# Altium PCB NewOver.PcbDoc
Units mil, origin at the board's own origin, x right, y up, seen from the top; angles counter-clockwise.
Board outline 1340 x 1670 mil, 2 copper layers (Top Layer, Bottom Layer); 37 components, 58 nets, 131 pads, 41 vias.
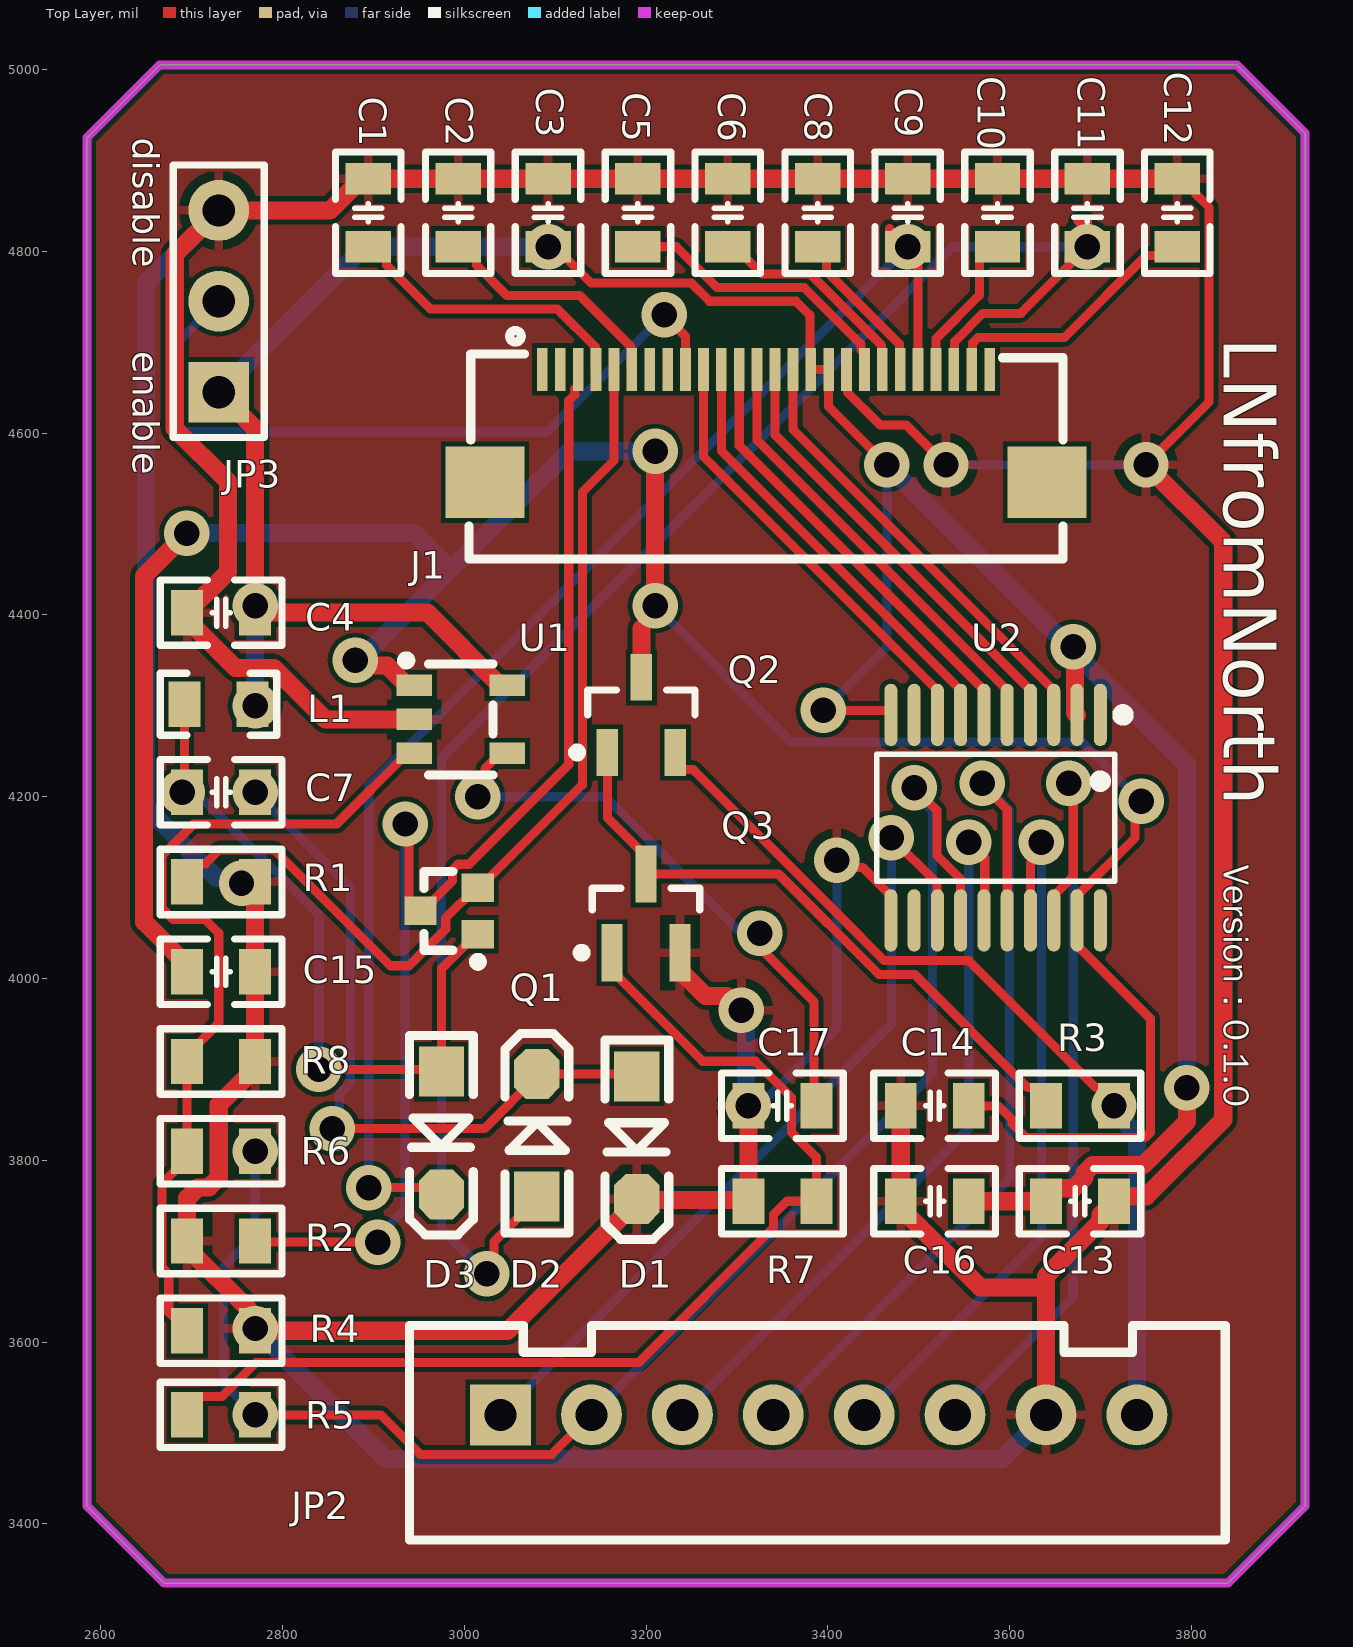
[diagram p0: Top Layer view]
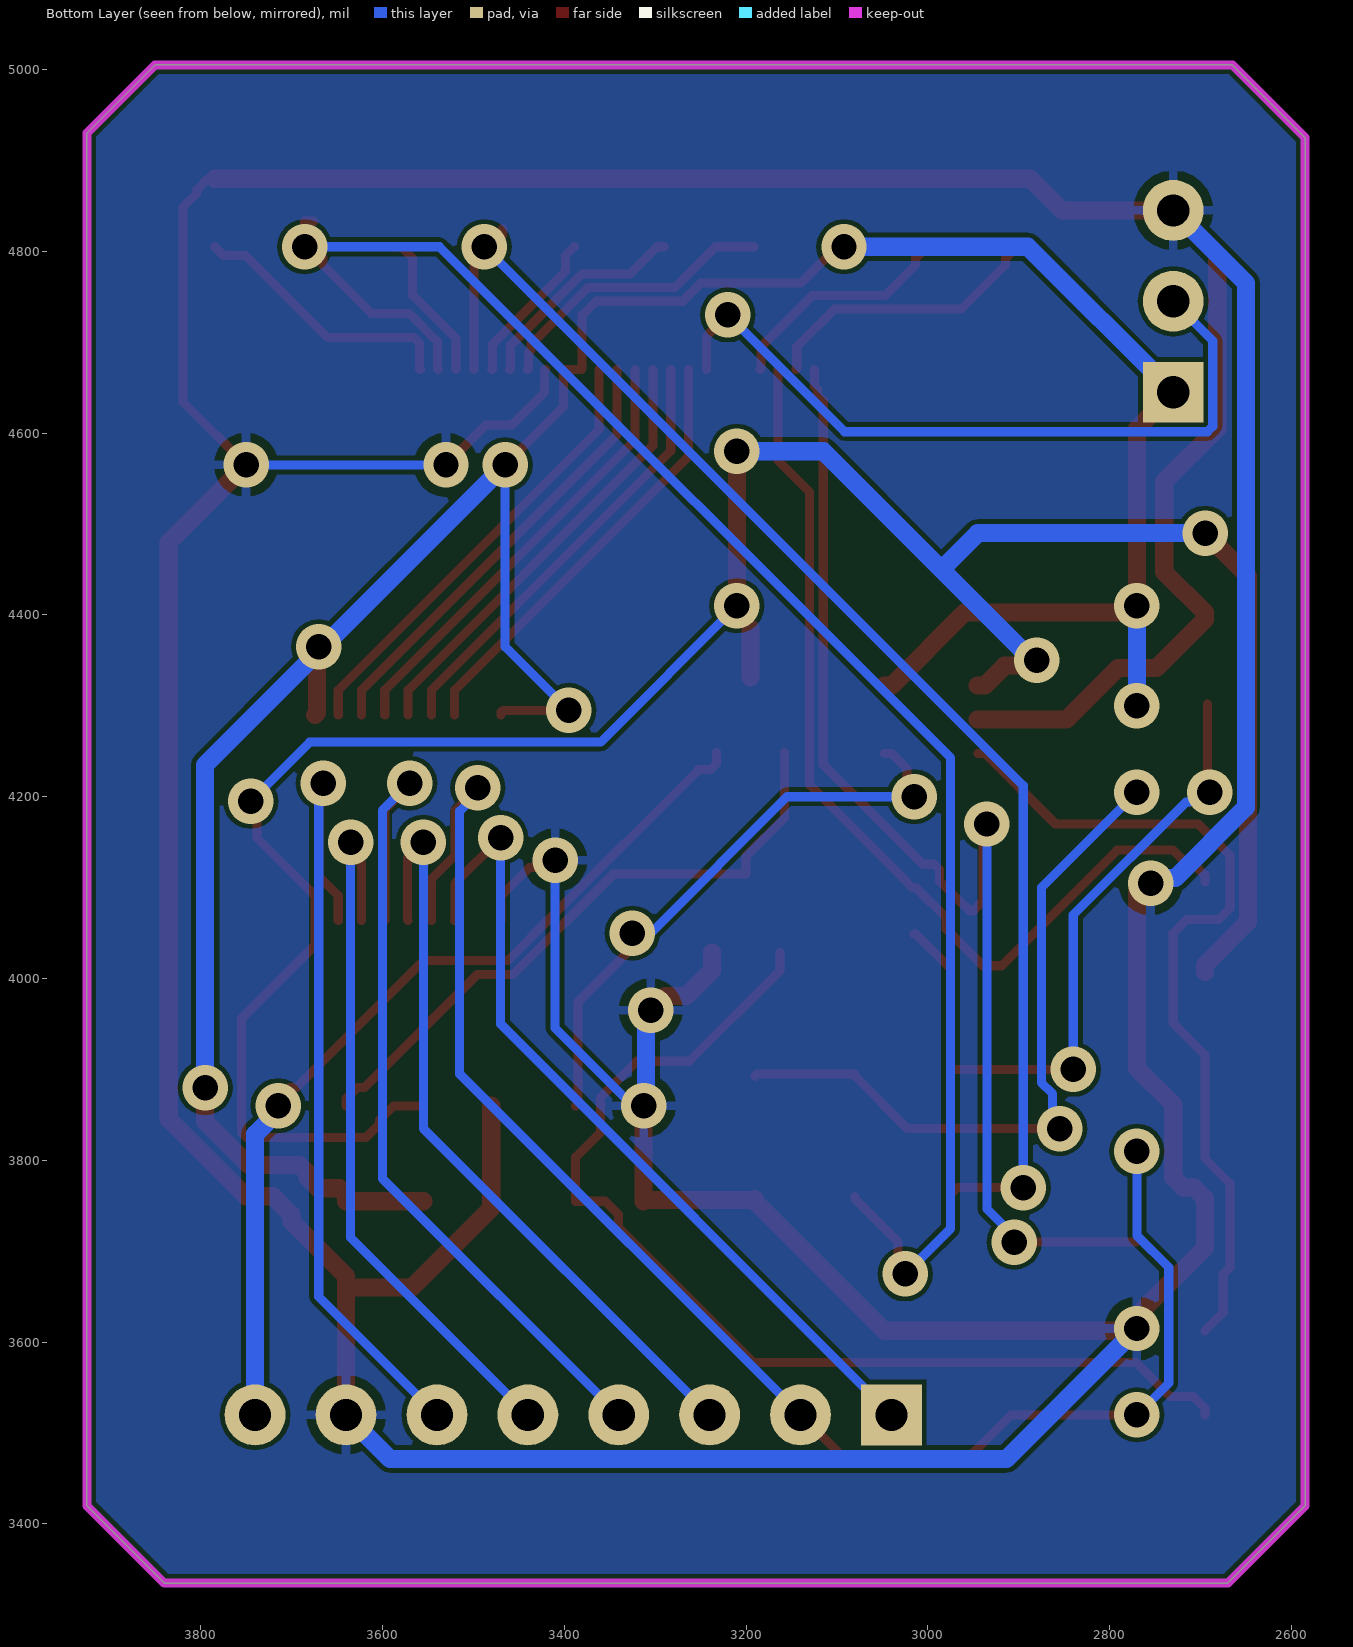
[diagram p1: Bottom Layer view, seen from below]

## Layer stack, top to bottom
Top Solder: solder mask 0.4, Solder Resist, Dk 3.5
Top Layer: signal copper 1.4
Dielectric 1: dielectric 12.6, FR-4, Dk 4.8
Bottom Layer: signal copper 1.4
Bottom Solder: solder mask 0.4, Solder Resist, Dk 3.5

## Board outline
2585,3420 2585,4925 2665,5005 3850,5005 3855,5000 3925,4930 3925,3420 3840,3335 2670,3335

## Design rules (kind name [scope] priority, off if disabled: settings)
Clearance [All] p1: gap=5 ignorepadtopadclearanceinfootprint=FALSE
PolygonConnect [All] p1: connectstyle=Relief reliefconductorwidth=10 reliefentries=4 polygonreliefangle="90 Angle" airgapwidth=10
RoutingVias [All] p1: holewidth=28 width=50 viastyle="Through Hole" minholewidth=28 minwidth=50 maxholewidth=28 maxwidth=50
SolderMaskExpansion [All] p1: expansion=4 istentingtop=FALSE
Width [All] p1: maxlimit=100 minlimit=10 preferedwidth=10 minimp=50.000000 maximp=50.000000 favimp=50.000000
30 further rules are at their usual default settings.

## Components (designator, comment, footprint, x,y, rotation, side; value= is the part's Value field where it differs from the comment)
C1 "104" C0805_L 2894.45,4842.4 r270 top
C2 "104" C0805_L 2993.34,4842.4 r270 top
C3 "104" C0805_L 3092.22,4842.4 r270 top
C4 "104" C0805_L 2732.6,4402.5 r0 top
C5 "104" C0805_L 3191.11,4842.4 r270 top
C6 "104" C0805_L 3290,4842.4 r270 top
C7 "104" C0805_L 2732.6,4205 r180 top
C8 "104" C0805_L 3388.89,4842.4 r270 top
C9 "104" C0805_L 3487.78,4842.4 r270 top
C10 "104" C0805_L 3586.67,4842.4 r270 top
C11 "104" C0805_L 3685.56,4842.4 r270 top
C12 "104" C0805_L 3784.45,4842.4 r270 top
C13 "104" C0805_L 3677.4,3755 r0 top
C14 "104" C0805_L 3517.6,3860 r180 top
C15 "104" C0805_L 2732.6,4007.5 r0 top
C16 "104" C0805_L 3517.6,3755 r180 top
C17 "104" C0805_L 3350,3860 r180 top
D1 "1N4007" SOD-123 3190,3825 r270 top
D2 "1N4007" SOD-123 3080,3827.5 r90 top
D3 "1N4007" SOD-123 2975,3830 r270 top
J1 "PFC26" PFC26 3085.9,4670 r0 top
JP2 "HDR-1X8" XH2.54-LI-8P 3390,3520 r0 top
JP3 "HDR-1X3" HDR2.54-LI-3P 2730,4745 r90 top
L1 "10uH" L0805 2729.67,4301.75 r180 top
Q1 "si1308" si1308 3015,4048.82 r0 top (schematic designator Q?)
Q2 "AO3401" SOT23-3N 3195,4290 r90 top
Q3 "BCP68" SOT23-3M 3200,4071.69 r90 top
R1 "1K" R0805_L 2732.6,4106.25 r0 top
R2 "1K" R0805_L 2732.6,3711.25 r0 top
R3 "1K" R0805_L 3677.4,3860 r180 top
R4 "1K" R0805_L 2732.6,3612.5 r180 top
R5 "1K" R0805_L 2732.6,3520 r180 top
R6 "1K" R0805_L 2732.6,3810 r180 top
R7 "1K" R0805_L 3350,3755 r180 top
R8 "1K" R0805_L 2732.6,3908.75 r0 top
U1 "RT9193-33" RT9193-33 2945,4322.4 r180 top
U2 "TXS0108E" TXS0108E 3699.72,4290 r180 top

## Footprints (in the part's own frame and the unit in brackets; to place one, negate y for a bottom-side part, rotate by r counter-clockwise, add the part's x,y. Pads: shape width x height; smd on the part's side, far side on the other; paste and mask are expansions set on the pad)
C0805_L [mil] "贴片MLCC电容"
  rect 35x50 smd: 1(-37.41,0) 2(37.4,0)
  silkscreen extent -67,-36 67,36, body extent -39,-24 39,24, height 22
HDR2.54-LI-3P [mm] "排针，3脚                        联系卖家 免费查找封装"
  rect 1.7x1.7 hole 0.9: 1(-2.54,0)
  round 1.7 hole 0.9: 2(0,0) 3(2.54,0)
  silkscreen extent -3.81,-1.27 3.81,1.27, body extent -3.81,-1.27 3.81,1.27, height 2.54
L0805 [mil] "小功率贴片电感                联系卖家 免费查找封装"
  rect 35x50 smd: 1(-37.4,0) 2(37.4,0)
  silkscreen extent -64,-34 64,34, body extent -39,-24 39,24, height 35
PFC26 [mm]
  rect 0.3x1.2 smd: 1(0,0) 2(0.502,0) 3(1.002,0) 4(1.502,0) 5(2.002,0) 6(2.502,0) 7(3.002,0) 8(3.502,0) 9(4.002,0) 10(4.502,0) 11(5.002,0) 12(5.502,0) 13(6.002,0) 14(6.502,0) 15(7.002,0) 16(7.502,0) 17(8.002,0) 18(8.502,0) 19(9.004,-0.002) 20(9.502,0) 21(10,0.002) 22(10.5,0.002) 23(11,0.002) 24(11.5,0.002) 25(12,0.002) 26(12.5,0.002)
  rect 2.2x2 smd: 27(14.1,-3.15) 28(-1.6,-3.15)
  silkscreen extent -2.05,-5.3 14.55,1.09
R0805_L [mil] "1/8W贴片电阻"
  rect 35x50 smd: 1(-37.41,0) 2(37.4,0)
  silkscreen extent -67,-36 67,36, body extent -39,-25 39,25, height 20
RT9193-33 [mm]
  rect 1x0.6 smd: 1(0,0) 2(0,0.95) 3(0,1.9) 4(-2.6,1.9) 5(-2.6,0)
  silkscreen extent -2.2,-0.83 0.35,2.5
si1308 [mm]
  rect 0.9x0.8 smd: 1(0,0) 2(0,1.3) 3(-1.6,0.65)
  silkscreen extent -1.5,-0.9 0.13,1.75
SOD-123 [mil] "2.7x1.6X1.1mm（长宽高，不包括引脚） 淘宝ID:黄晶宝石"
  rect 55x50 smd: 1(-67.5,0)
  oct 55x50 smd: 2(67.5,0)
  silkscreen extent -108,-35 112,35, body extent -73,-32 73,31, height 50
SOT23-3M [mm] "SOT23, 3-Leads, Body 2.9x1.3mm, Pitch 0.95mm, Lead Span 2.4mm, IPC Low Density"
  rect 1.6x0.6 smd: 1(-1.1,0.95) 2(-1.1,-0.95) 3(1.1,0)
  silkscreen extent -1.22,-1.5 0.7,1.92, body extent -1.4,-1.45 1.4,1.45, height 1.2
SOT23-3N [mm] "SOT23, 3-Leads, Body 2.9x1.3mm, Pitch 0.95mm, Lead Span 2.4mm, IPC Medium Density"
  rect 1.3x0.6 smd: 1(-1.05,0.95) 2(-1.05,-0.95) 3(1.05,0)
  silkscreen extent -1.17,-1.5 0.7,1.92, body extent -1.2,-1.5 1.2,1.5, height 1.05
TXS0108E [mm]
  oval 0.364x1.742 smd: 1(0,0) 2(0.65,0) 3(1.3,0) 4(1.95,0) 5(2.6,0) 6(3.25,0) 7(3.9,0) 8(4.55,0) 9(5.2,0) 10(5.85,0) 11(5.85,5.742) 12(5.2,5.742) 13(4.55,5.742) 14(3.9,5.742) 15(3.25,5.742) 16(2.6,5.742) 17(1.95,5.742) 18(1.3,5.742) 19(0.65,5.742) 20(0,5.742)
  silkscreen extent -0.78,-0.15 6.25,4.64
XH2.54-LI-8P [mm] "接插件，8P"
  rect 1.7x1.7 hole 0.9: 1(-8.89,0)
  round 1.7 hole 0.9: 2(-6.35,0) 3(-3.81,0) 4(-1.27,0) 5(1.27,0) 6(3.81,0) 7(6.35,0) 8(8.89,0)
  silkscreen extent -11.43,-3.5 11.36,2.5, body extent -11.39,-3.3 11.39,2.4, height 7.05

## Part data
C1 C2 C3 C4 C5 C6 C7 C8 C9 C10 C11 C12 C13 C14 C15 C16 C17: library part C, "贴片电容/MLCC电容", BOM名称=无极性贴片电容, 联系卖家，免费查找封装=唯一出售店铺网址https://shop463601444.taobao.com
D1 D2 D3: "整流二极管", BOM名称=整流二极管, 以赠品形式获赠本封装库的买家，还可联系卖家免费指导AD软件使用=封装库来自淘宝卖家ID：黄晶宝石
JP2: library part "Header 8", "8P接插件", BOM名称=8P接插件, 封装库来自淘宝卖家ID:黄晶宝石=其他店铺购入均为盗版假冒封装库，请立即申请退款，本店现金奖励20~200元, 联系卖家，免费查找封装=唯一出售店铺网址https://shop463601444.taobao.com
JP3: library part "Header 3", "3P接插件", BOM名称=3P接插件, 封装库来自淘宝卖家ID:黄晶宝石=其他店铺购入均为盗版假冒封装库，请立即申请退款，本店现金奖励20~200元, 联系卖家，免费查找封装=唯一出售店铺网址https://shop463601444.taobao.com
L1: library part L, "贴片小功率电感", BOM名称=小功率贴片电感, 联系卖家，免费查找封装=唯一出售店铺网址https://shop463601444.taobao.com
Q2: "P沟道 30V/4.2A", 8元以下特价购入的买家=还可以联系卖家远程指导AD软件使用, BOM名称=场效应管, 参数="P沟道 30V/4.2A"
Q3: "NPN三极管", 8元以下特价购入的买家=还可以联系卖家远程指导AD软件使用
R1 R2 R3 R4 R5 R6 R7 R8: library part R, "贴片电阻", BOM名称=贴片电阻, 联系卖家，免费查找封装=唯一出售店铺网址https://shop463601444.taobao.com

## Via types
v1: diameter 50, hole 28, Top Layer to Bottom Layer, 41 vias

## Nets (pads, with @x,y where several pads share a name; then routed paths per layer and width w, separated by ;. In a path a pad name is that pad's centre, name@x,y a point inside that pad or via, vN(x,y) a via of type N, cw(c..) or ccw(c..) an arc to the next point about the centre after c; other vN are vias at no path point)
+3.3: C3.2 C4.2 C13.1 C16.1 J1.16 J1.17 JP3.1 L1.1 U1.5 U2.2 U2.10 | length 3235.1
  Top Layer w10: v1(3092.22,4805) 3099.72,4805 3139.72,4765 3250,4765 3269.89,4745.11 3364.89,4745.11 3380.35,4729.65 3380.35,4670.91 J1.16 J1.17 3400.94,4629.06 v1(3465,4565) ; v1(3395,4295) 3467.41,4295 3469.41,4293 U2.10
  Top Layer w20: JP3.1 2769.99,4605.01 C4.2 2959.38,4402.5 3039.49,4322.39 U1.5 ; C16.1 C13.1 3640,3761.84 3647.5,3769.34 3670.59,3769.34 3682.3,3781.06 3682.3,3786.21 3691.09,3795 3747.43,3795 3795,3842.57 v1(3795,3880) ; v1(3670,4365) 3672.07,4362.93 3672.07,4292.07 U2.2
  Bottom Layer w10: v1(3395,4295) 3465,4365 v1(3465,4565)
  Bottom Layer w20: JP3.1 2890,4805 v1(3092.22,4805) ; v1(2770,4300) v1(2769.99,4410) ; v1(3465,4565) 3795,4235 v1(3795,3880)
BS: J1.9 JP3.2 | length 814.4
  Top Layer w10: v1(3220,4730) 3243.46,4706.54 J1.9
  Bottom Layer w10: JP3.2 2686.54,4701.54 2686.54,4607.39 2692.39,4601.54 3091.54,4601.54 v1(3220,4730)
BUSY: JP2.1 U2.13 | length 925.1
  Top Layer w10: v1(3470,4155) 3520.3,4104.7 3520.3,4064.23 U2.13
  Bottom Layer w10: JP2.1 3470,3950 v1(3470,4155)
CLK: JP2.5 U2.17 | length 801.8
  Top Layer w10: U2.17 3622.95,4127.13 3635,4139.18 v1(3635,4150)
  Bottom Layer w10: JP2.5 3635,3715 v1(3635,4150)
CS: JP2.4 U2.16 | length 977.5
  Top Layer w10: v1(3570,4215) 3570,4213.16 3597.36,4185.79 U2.16
  Bottom Layer w10: JP2.4 3600,3780 3600,4185 v1(3570,4215)
D/C: JP2.3 U2.15 | length 854.2
  Top Layer w10: v1(3555,4150) 3572.6,4132.4 3572.6,4064.77 U2.15
  Bottom Layer w10: JP2.3 3555,3835 v1(3555,4150)
DIN: JP2.6 U2.18 | length 912.9
  Top Layer w10: U2.18 3648.54,4091.06 3670,4112.52 3670,4210 v1(3665,4215)
  Bottom Layer w10: JP2.6 3670,3650 3670,4210 v1(3665,4215)
GDR: J1.3 Q1.3 R2.2 | length 1385.4
  Top Layer w10: R2.2 2771.24,3710 v1(2905,3710) ; v1(2935,4170) 2939.29,4165.71 2939.29,4085.16 2950.04,4074.41 Q1.3 ; Q1.3@2953.98,4074.41 2964.72,4085.16 2987.28,4107.72 2987.28,4119.89 2993.14,4125.75 3005.31,4125.75 3115,4235.43 3115,4635.66 3121.58,4642.24 3121.58,4648.51 3124.44,4651.38 3124.44,4669.09 J1.3
  Bottom Layer w10: v1(2905,3710) 2905,3716.57 2935,3746.57 v1(2935,4170)
GND: C1.1 C2.1 C3.1 C4.1 C5.1 C6.1 C8.1 C9.1 C10.1 C11.1 C12.1 C13.2 C14.2 C15.2 C16.2 C17.2 D1.2 J1.18 JP2.7 JP3.3 Q3.2 R1.2 R2.1 R4.1 R7.2 R8.2 U1.2 U2.11 | length 7764.6
  Top Layer w10: v1(3410,4130) 3417.65,4122.35 3438.13,4122.35 3469.41,4091.06 U2.11 ; J1.18 3421.54,4669.09 3421.54,4645.12 3457.77,4608.89 3486.11,4608.89 v1(3530,4565) ; v1(3750,4565) 3819.44,4634.44 3819.44,4848.29 3804.44,4863.29 3804.44,4867.3 3791.94,4879.8 C12.1
  Top Layer w20: v1(2755,4105) 2768.74,4105 R1.2 C15.2 R8.2 2769.99,3901.25 2730,3861.26 2730,3781.09 2718.91,3770 2706.91,3770 2695.19,3758.28 R2.1 2695.19,3703.75 R4.1@2762.5,3636.44 ; R4.1 3047.5,3612.5 3190,3755 D1.2 3191.25,3756.25 3311.35,3756.25 R7.2 v1(3312.6,3860) ; U1.2 2847.54,4285 2790.78,4341.75 2748.44,4341.75 2695.19,4395 C4.1 2740,4447.31 2740,4546.86 2681.54,4605.32 2681.54,4796.54 JP3.3 2852.14,4845 2886.94,4879.8 C1.1 C2.1 C3.1 C5.1 C6.1 C8.1 C9.1 C10.1 C11.1 C12.1 ; Q3.2 3237.4,4008.7 3265.36,3980.74 3289.26,3980.74 v1(3305,3965) ; C14.2 C16.2 3480.2,3747.5 3567.7,3660 3640,3660 ; JP2.7 3640,3660 ; v1(3750,4565) 3835,4480 3835,3845 3750.59,3760.59 3720.39,3760.59 C13.2 3699.9,3740.1 3699.9,3732.6 3640,3672.7 3640,3660
  Bottom Layer w10: v1@3332.15,3867.66 3410,3945.5 v1(3410,4130) ; v1(3530,4565) v1(3750,4565)
  Bottom Layer w20: JP3.3 2650,4765 2650,4188.43 2727.69,4110.74 2749.26,4110.74 v1(2755,4105) ; v1(2770,3615) 2913.46,3471.54 3591.54,3471.54 JP2.7 ; v1(3305,3965) 3310,3960 3310,3862.6 v1(3312.6,3860)
"ID SC": 
"ID SD": 
NetC1_2: C1.2 J1.4 | length 325
  Top Layer w10: C1.2 2901.94,4805 2914.44,4792.5 2914.44,4785 2963.06,4736.38 3102.64,4736.38 3144.13,4694.89 3144.13,4670.91 J1.4
NetC2_2: C2.2 J1.6 | length 265.4
  Top Layer w10: C2.2 3000.83,4805 3013.33,4792.5 3013.33,4785 3046.95,4751.38 3127.01,4751.38 3183.5,4694.89 3183.5,4670.91 J1.6
NetC5_2: C5.2 J1.19 | length 319.3
  Top Layer w10: C5.2 3233.36,4805 3278.25,4760.11 3374.19,4760.11 3429.79,4704.51 3436.54,4697.76 3436.54,4691.51 3439.48,4688.56 3439.48,4670.85 J1.19
NetC6_2: C6.2 J1.20 | length 240.9
  Top Layer w10: C6.2 3297.5,4805 3327.39,4775.11 3380.41,4775.11 3459.09,4696.42 3459.09,4670.91 J1.20
NetC7_1: C7.1 D1.1 D2.2 | length 784.1
  Top Layer w10: v1(2855,3835) 3022.5,3835 3080,3892.5 D2.2 3187.5,3895 D1.1
  Bottom Layer w10: v1(2770,4205) 2875,4100 2875,3885.5 2862.65,3873.16 2862.65,3842.65 v1(2855,3835)
NetC7_2: C7.2 D3.1 L1.2 Q1.1 | length 774.8
  Top Layer w10: C7.2@2692.27,4207.93 L1.2 ; v1(2840,3900) 2972.5,3900 D3.1 2975,4010.79 3013.03,4048.82 Q1.1
  Bottom Layer w10: v1(2690,4205) 2700.82,4205 2711.61,4194.22 2715.78,4194.22 2840,4070 v1(2840,3900)
NetC8_2: C8.2 J1.21 | length 172.5
  Top Layer w10: C8.2 3398.37,4795.52 3398.37,4778.36 3478.69,4698.03 3478.69,4670.97 J1.21
NetC10_2: C10.2 J1.23 | length 167.4
  Top Layer w10: J1.23 3518.97,4703.97 3566.67,4751.67 3566.67,4792.5 3579.17,4805 C10.2
NetC12_2: C12.2 J1.25 | length 298.5
  Top Layer w10: J1.25 3559.25,4670.97 3559.25,4699.14 3565.1,4705 3660,4705 3750.37,4795.37 3774.81,4795.37 C12.2
NetC17_1: C17.1 U1.4 | length 653.6
  Top Layer w10: v1(3015,4200) 3022.68,4207.68 3022.68,4230.78 3039.49,4247.59 U1.4 ; v1(3325,4050) 3325,4034.18 3385,3974.18 3385,3862.41 C17.1
  Bottom Layer w10: v1(3015,4200) 3155,4200 3305,4050 v1(3325,4050)
NetQ2_1: Q2.1 Q3.3 R3.2 | length 701.2
  Top Layer w10: Q2.1 3157.6,4177.09 3200,4134.69 Q3.3 3345.73,4115 3456.09,4004.65 3495.35,4004.65 3620,3880 3627.5,3880 3640,3867.5 R3.2
NetQ3_1: Q3.1 R5.2 R7.1 | length 1202.8
  Top Layer w10: R5.2 2695.2,3527.5 2707.7,3540 2733.36,3540 2770.86,3577.5 3191.74,3577.5 3340.1,3725.86 3340.1,3740.2 3354.9,3755 R7.1 3387.4,3803.36 3359.9,3830.86 3359.9,3869.34 3320.27,3908.97 3262.33,3908.97 3162.6,4008.7 Q3.1
P4: 
P5: 
P6: 
P12: 
P13: 
P16: 
P17: J1.11 U2.7 | length 489.1
  Top Layer w10: J1.11 3282.83,4580.48 3546.18,4317.13 U2.7
P18: 
P19: 
P20: 
P21: 
P22: 
P23: 
P24: J1.10 U2.8 | length 486.6
  Top Layer w10: J1.10 3263.15,4574.57 3520.59,4317.13 U2.8
P25: J1.12 U2.6 | length 491.5
  Top Layer w10: J1.12 3302.52,4586.38 3571.77,4317.13 U2.6
P26: 
P27: 
"P 3V3": 
"P CEI": 
"P CEO": J1.13 U2.5 | length 494
  Top Layer w10: J1.13 3322.2,4592.29 3597.36,4317.13 U2.5
"P MISO": 
"P MOSI": J1.15 U2.3 | length 498.9
  Top Layer w10: J1.15 3361.57,4604.1 3648.54,4317.13 U2.3
"P RX": 
"P SCK": J1.14 U2.4 | length 496.4
  Top Layer w10: J1.14 3341.89,4598.19 3622.95,4317.13 U2.4
"P SCL": 
"P SDA": 
"P TX": 
PREVGH: C9.2 D3.2 J1.22 | length 1564.3
  Top Layer w10: v1(2895,3770) 2967.5,3770 D3.2 ; J1.22 3499.29,4793.49 v1(3487.78,4805) ; v1(3487.78,4805) 3467.78,4825 3467.78,4817.5 3480.28,4805 v1(3487.78,4805)
  Bottom Layer w10: v1(2895,3770) 2895,4212.22 v1(3487.78,4805)
PREVGL: C11.2 D2.1 J1.24 | length 1935.9
  Top Layer w10: v1(3025,3675) 3032.65,3682.65 3032.65,3710.15 3080,3757.5 D2.1 ; J1.24 3539.57,4670.97 3539.57,4700.68 3570.64,4731.75 3612.31,4731.75 3665.55,4785 3665.55,4792.5 3678.05,4805 v1(3685.55,4805) ; v1(3685.55,4805) 3685.55,4833.49 3675.22,4833.49 3685.55,4823.16 v1(3685.55,4805)
  Bottom Layer w10: v1(3025,3675) 2975,3725 2975,4242.73 3537.27,4805 v1(3685.55,4805)
RESE: J1.5 Q1.2 R1.1 | length 1067.3
  Top Layer w10: R1.1 2695.19,4113.75 2707.69,4126.25 2715.19,4126.25 2730.19,4141.25 2791.64,4141.25 2918.82,4014.07 2939.27,4014.07 2979.72,4054.52 2979.72,4066.69 3013.03,4100 Q1.2 3016.97,4100 3027.72,4110.75 3130,4213.03 3130,4535 3164.72,4569.72 J1.5
"RPI 5V": 
RST: JP2.2 R5.1 R6.1 U2.14 | length 1745.9
  Top Layer w10: v1(2770,3520) 2908.32,3520 2951.79,3476.54 3096.54,3476.54 JP2.2 ; v1(3495,4210) 3520,4185 3520,4135.5 3546.18,4109.32 U2.14
  Bottom Layer w10: v1(2770,3520) 2735,3555 2735,3682.34 2770,3717.34 v1(2770,3810) ; JP2.2 3515,3895 3515,4184.14 3495,4204.14 v1(3495,4210)
VCC: C14.1 C15.1 Q2.3 U1.1 U2.19 | length 2824.1
  Top Layer w10: C14.1 3587.5,3860 3602.93,3844.57 3602.93,3840.43 3618.36,3825 3749.14,3825 3755,3830.86 3755,3955.95 3674.13,4036.81 U2.19 3674.13,4091.06 3738.07,4155 3738.07,4188.07 v1(3745,4195)
  Top Layer w20: v1(2695,4490) 2647.69,4442.69 2647.69,4062.5 2695.19,4015 C15.1 ; v1(2880,4350) 2885.74,4344.26 2915.27,4344.26 2937.13,4322.4 U1.1 ; Q2.3 3195,4385 ; v1(3210,4410) v1(3210,4580)
  Bottom Layer w10: v1(3210,4410) 3360,4260 3680,4260 v1(3745,4195)
  Bottom Layer w20: v1(2695,4490) 2945,4490 2985,4450 ; v1(2880,4350) 2885,4350 2985,4450 ; v1(3210,4580) 3115,4580 2985,4450
VCC_EN: R4.2 R6.2 R8.1 U1.3 | length 930.3
  Top Layer w10: R4.2 2675,3632.7 2675,3674.8 2667.69,3682.11 2667.69,3774.99 2695.2,3802.5 R6.2 R8.1 2695.19,3916.25 2730,3951.06 2730,4050 2715.19,4064.81 2679.99,4064.81 2667.69,4077.11 2667.69,4135.39 2702.3,4170 2859.52,4170 2937.12,4247.6 U1.3
VCC_INT: JP2.8 Q2.2 R3.1 | length 980.1
  Top Layer w10: Q2.2 3232.4,4236.61 3239.21,4229.8 3252.15,4229.8 3411.53,4070.42 3462.3,4019.65 3555.16,4019.65 3694.8,3880 R3.1@3702.3,3880
  Bottom Layer w10: v1@3714.8,3853.82 v1(3714.8,3860)
  Bottom Layer w20: v1@3714.8,3853.82 3740,3828.63 JP2.8
pads on no net: J1.1 J1.2 J1.7 J1.8 J1.26 J1.27 J1.28 U2.1 U2.9 U2.12 U2.20

## Polygon pours and split planes (outlines as drawn)
GND on Bottom Layer "GND_L02_P000" (solid, remove dead copper, pour order 0): 3925,4930 3850,5005 2665,5005 2585,4925 2585,3420 2670,3335 3840,3335 3925,3420
GND on Top Layer "GND_L01_P002" (solid, remove dead copper, pour order 2): 4055,4655
GND on Top Layer "GND_L01_P001" (solid, remove dead copper, pour order 1): 3925,4930 3925,3425 3840,3340 3840,3335 2670,3335 2585,3420 2585,4925 2665,5005 3850,5005

## Keep-outs
Keep-Out Layer:
  lines w10: 2585,3420 2585,4925 2665,5005 3850,5005 3925,4930 3925,3425 3925,3420 3840,3335 2670,3335 2585,3420

## Silkscreen, mask and mechanical layers (free items; w line width, h text height)
Top Overlay:
  text "disable" at 2625.6,4925 h50 r270
  text "LNfromNorth" at 3816.2,4705 h100 r270
  text "enable" at 2625.6,4690 h50 r270
  text "Version：0.1.0" at 3825.69,4125 h50 r270
Mechanical 1:
  lines w10: 3850,5005 2665,5005 2585,4925 2585,3420 2670,3335 3840,3335 3925,3420 3925,4930